# EAGLE board orao-keyboard (EAGLE 9.6.2)

Size 58.4 x 59.36 mm. Coordinates in mm from the lower left corner, seen from the top.
Outline: 0,0 58.4,0 58.4,59.36 0,59.36 0,0
Copper layers (1*16): Top 0.035mm / dielectric 1.5mm / Bottom 0.035mm
Design rules "dirt_cheap_dirty_boards.v1": minimum track width 5mil, minimum drill 12mil, track to track 5mil, track to pad 5mil, pad to pad 5mil, via to via 5mil, smd to smd 0mil, copper to edge 10mil, drill to drill 10mil, minimum pad ring 10mil, minimum via ring 6mil, stop-mask expansion 2mil, vias tented up to drill 25mil, thermal gap 10mil

## Footprints (pad centres in the part's own frame; a part is rotated, then mirrored left to right if it is on the bottom)
ARDUINO_NANO = drill 0.8 square: 1 -20.32,-7.62 | drill 0.8: 2 -17.78,-7.62; 3 -15.24,-7.62; 4 -12.7,-7.62; 5 -10.16,-7.62; 6 -7.62,-7.62; 7 -5.08,-7.62; 8 -2.54,-7.62; 9 0,-7.62; 10 2.54,-7.62; 11 5.08,-7.62; 12 7.62,-7.62; 13 10.16,-7.62; 14 12.7,-7.62; 15 15.24,-7.62; 16 15.24,7.62; 17 12.7,7.62; 18 10.16,7.62; 19 7.62,7.62; 20 5.08,7.62; 21 2.54,7.62; 22 0,7.62; 23 -2.54,7.62; 24 -5.08,7.62; 25 -7.62,7.62; 26 -10.16,7.62; 27 -12.7,7.62; 28 -15.24,7.62; 29 -17.78,7.62; 30 -20.32,7.62
P1-13 = drill 1.321 pad 2.159 octagon: TP 0,0
DIL40 = drill 0.813 long: 1 -24.13,-7.62; 2 -21.59,-7.62; 3 -19.05,-7.62; 4 -16.51,-7.62; 5 -13.97,-7.62; 6 -11.43,-7.62; 7 -8.89,-7.62; 8 -6.35,-7.62; 9 -3.81,-7.62; 10 -1.27,-7.62; 11 1.27,-7.62; 12 3.81,-7.62; 13 6.35,-7.62; 14 8.89,-7.62; 15 11.43,-7.62; 16 13.97,-7.62; 17 16.51,-7.62; 18 19.05,-7.62; 19 21.59,-7.62; 20 24.13,-7.62; 21 24.13,7.62; 22 21.59,7.62; 23 19.05,7.62; 24 16.51,7.62; 25 13.97,7.62; 26 11.43,7.62; 27 8.89,7.62; 28 6.35,7.62; 29 3.81,7.62; 30 1.27,7.62; 31 -1.27,7.62; 32 -3.81,7.62; 33 -6.35,7.62; 34 -8.89,7.62; 35 -11.43,7.62; 36 -13.97,7.62; 37 -16.51,7.62; 38 -19.05,7.62; 39 -21.59,7.62; 40 -24.13,7.62
SOCKED-16 = drill 0.813 long: 1 -8.89,-3.81; 2 -6.35,-3.81; 3 -3.81,-3.81; 4 -1.27,-3.81; 5 1.27,-3.81; 6 3.81,-3.81; 7 6.35,-3.81; 8 8.89,-3.81; 9 8.89,3.81; 10 6.35,3.81; 11 3.81,3.81; 12 1.27,3.81; 13 -1.27,3.81; 14 -3.81,3.81; 15 -6.35,3.81; 16 -8.89,3.81
M_DIN6 = drill 0.9 pad 1.422 octagon: 1 -1.3,-3.75; 2 1.3,-3.75; 3 -3.4,-3.75; 5 3.4,-3.75; 6 -3.4,-6.2; 8 3.4,-6.25 | drill 2.3 pad 3.5: SH1 6.8,-0.75; SH2 0,0.05; SH3 -6.75,-0.75

## Placement (x,y rotation side)
ARDUINO_NANO  [ARDUINO_NANO]  12.7,33.02 270 top
GND  TPSPAD1-13  [P1-13]  45.08,49.53 90 top
IC1  MT8816AE1  [DIL40]  33.02,29.21 270 top
IC3  Orao keyboard connector  [SOCKED-16]  52.02,21.88 270 top
VCC  TPSPAD1-13  [P1-13]  45.08,53.34 90 top
X1  [M_DIN6]  12.7,5.71 180 top

## Library data of the parts
ARDUINO_NANO = ArduinoNanoV30
GND VCC = testpad
IC1 = MT8816
IC3 = ic-package
X1 = mini_din

## Nets
N$1: ARDUINO_NANO.20 X1.6
N$2: ARDUINO_NANO.21 X1.1
N$3: ARDUINO_NANO.19 X1.3
N$5: IC1.37 IC3.1
N$6: IC1.39 IC3.2
N$7: IC1.1 IC3.3
N$8: IC1.21 IC3.4
N$9: IC1.19 IC3.5
N$10: IC1.17 IC3.6
N$11: IC1.33 IC3.7
N$12: IC1.32 IC3.8
N$13: IC1.31 IC3.9
N$14: IC1.30 IC3.10
N$15: IC1.29 IC3.11
N$16: IC1.28 IC3.12
N$17: IC1.8 IC3.13
N$18: IC1.9 IC3.14
N$19: IC1.10 IC3.15
N$20: IC1.11 IC3.16
N$21: ARDUINO_NANO.22 IC1.38
N$22: ARDUINO_NANO.23 IC1.3
N$23: ARDUINO_NANO.24 IC1.36
N$24: ARDUINO_NANO.25 IC1.18
N$25: ARDUINO_NANO.26 IC1.5
N$26: ARDUINO_NANO.27 IC1.22
N$27: ARDUINO_NANO.28 IC1.23
N$28: ARDUINO_NANO.29 IC1.4
N$29: ARDUINO_NANO.30 IC1.24
N$30: ARDUINO_NANO.1 IC1.25
N$31: ARDUINO_NANO.4 IC1.2
N$32: ARDUINO_NANO.12 IC1.40 VCC.TP X1.5
N$33: ARDUINO_NANO.14 GND.TP IC1.16
PE1: X1.SH1
PE2: X1.SH2
PE3: X1.SH3
VEE: IC1.20
VIN: ARDUINO_NANO.15

## Tracks (layer width: path | path; a pad name or v marks a point on that pad's centre or on a via)
N$1  (1 unrouted)
N$2  (1 unrouted)
N$3  (1 unrouted)
N$5  (1 unrouted)
N$6  (1 unrouted)
N$7  (1 unrouted)
N$8  (1 unrouted)
N$9  (1 unrouted)
N$10  (1 unrouted)
N$11  (1 unrouted)
N$12  (1 unrouted)
N$13  (1 unrouted)
N$14  (1 unrouted)
N$15  (1 unrouted)
N$16  (1 unrouted)
N$17  (1 unrouted)
N$18  (1 unrouted)
N$19  (1 unrouted)
N$20  (1 unrouted)
N$21  (1 unrouted)
N$22  (1 unrouted)
N$23  (1 unrouted)
N$24  (1 unrouted)
N$25  (1 unrouted)
N$26  (1 unrouted)
N$27  (1 unrouted)
N$28  (1 unrouted)
N$29  (1 unrouted)
N$30  (1 unrouted)
N$31  (1 unrouted)
N$32  (3 unrouted)
N$33  (2 unrouted)

## Text on the board
tNames: vladovince.com | orao_keyboard